# Altium PCB PCB_REVA.PcbDoc
Units mil, origin at the board's own origin, x right, y up, seen from the top; angles counter-clockwise.
Board outline 2190 x 1590 mil, 4 copper layers (Top Layer, GND, Medium Layer, Bottom Layer), stack 18.234 mil thick; 109 components, 91 nets, 422 pads, 127 vias.
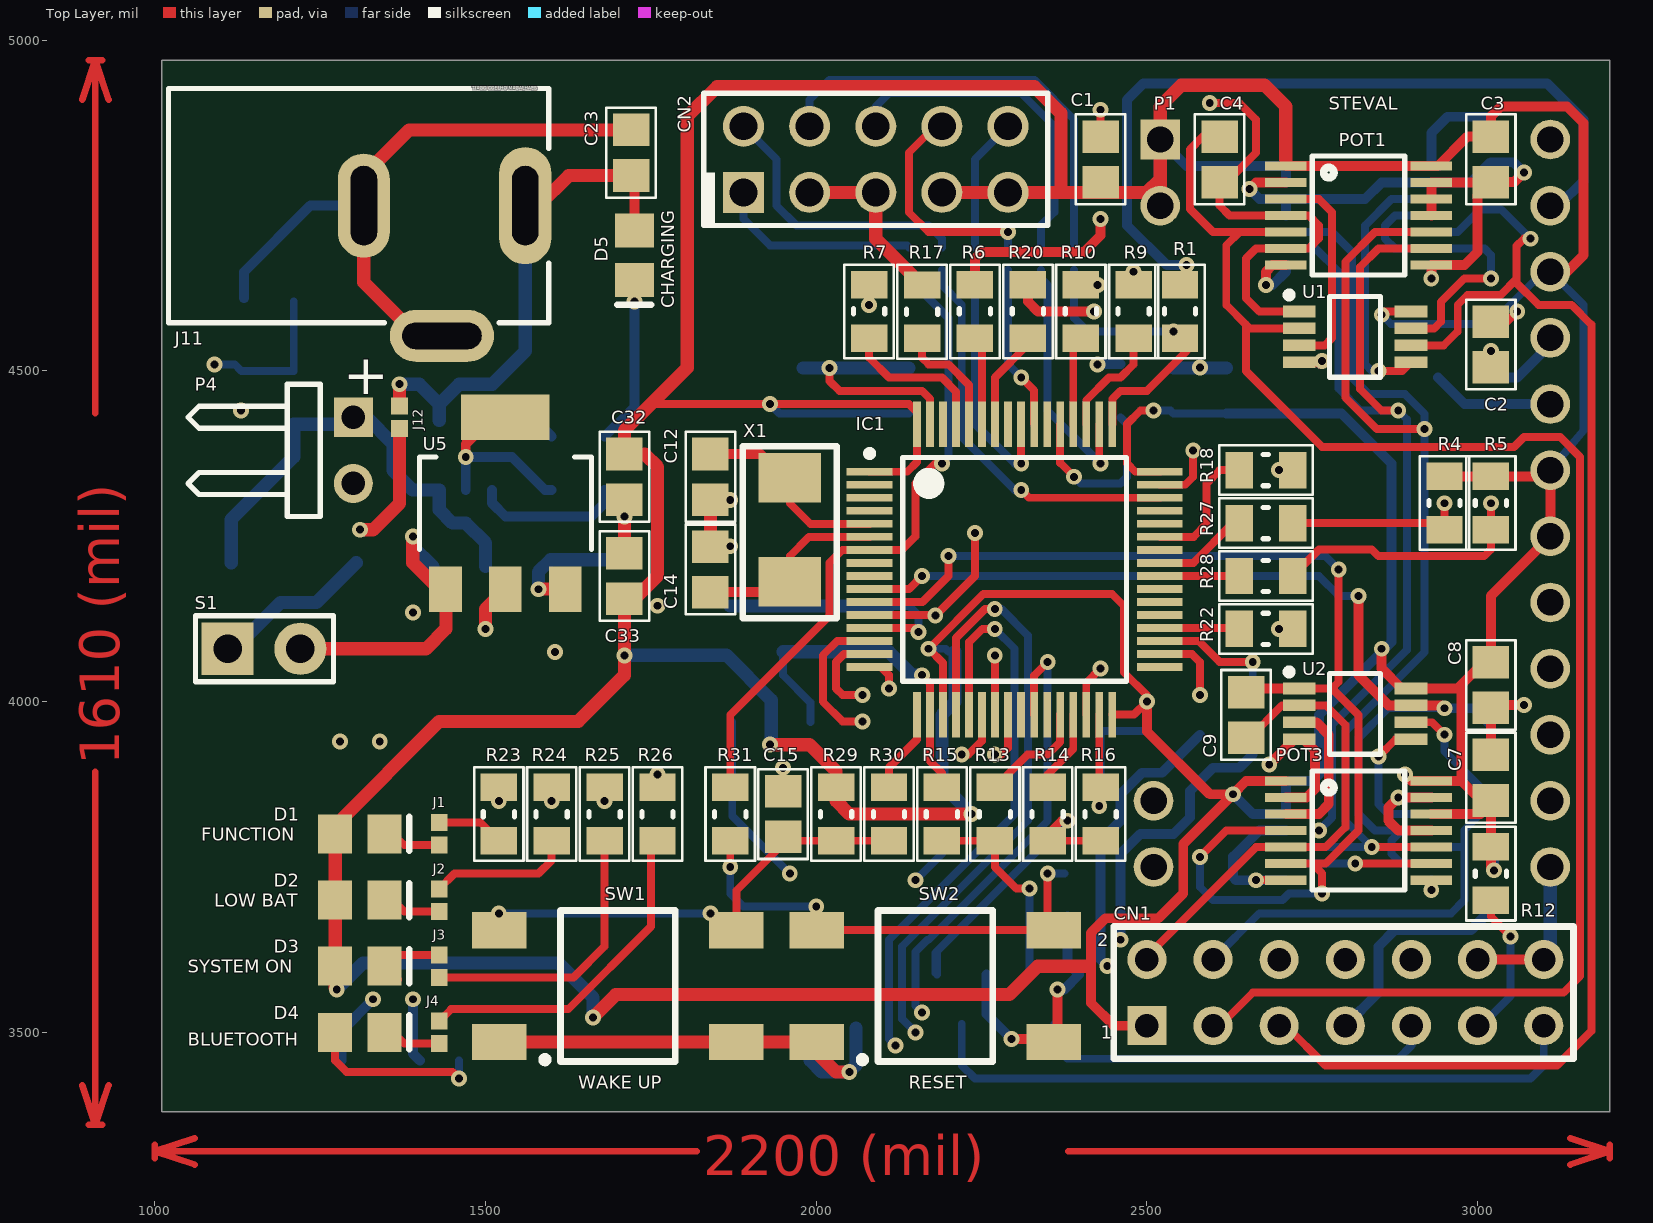
[diagram p0: Top Layer view]
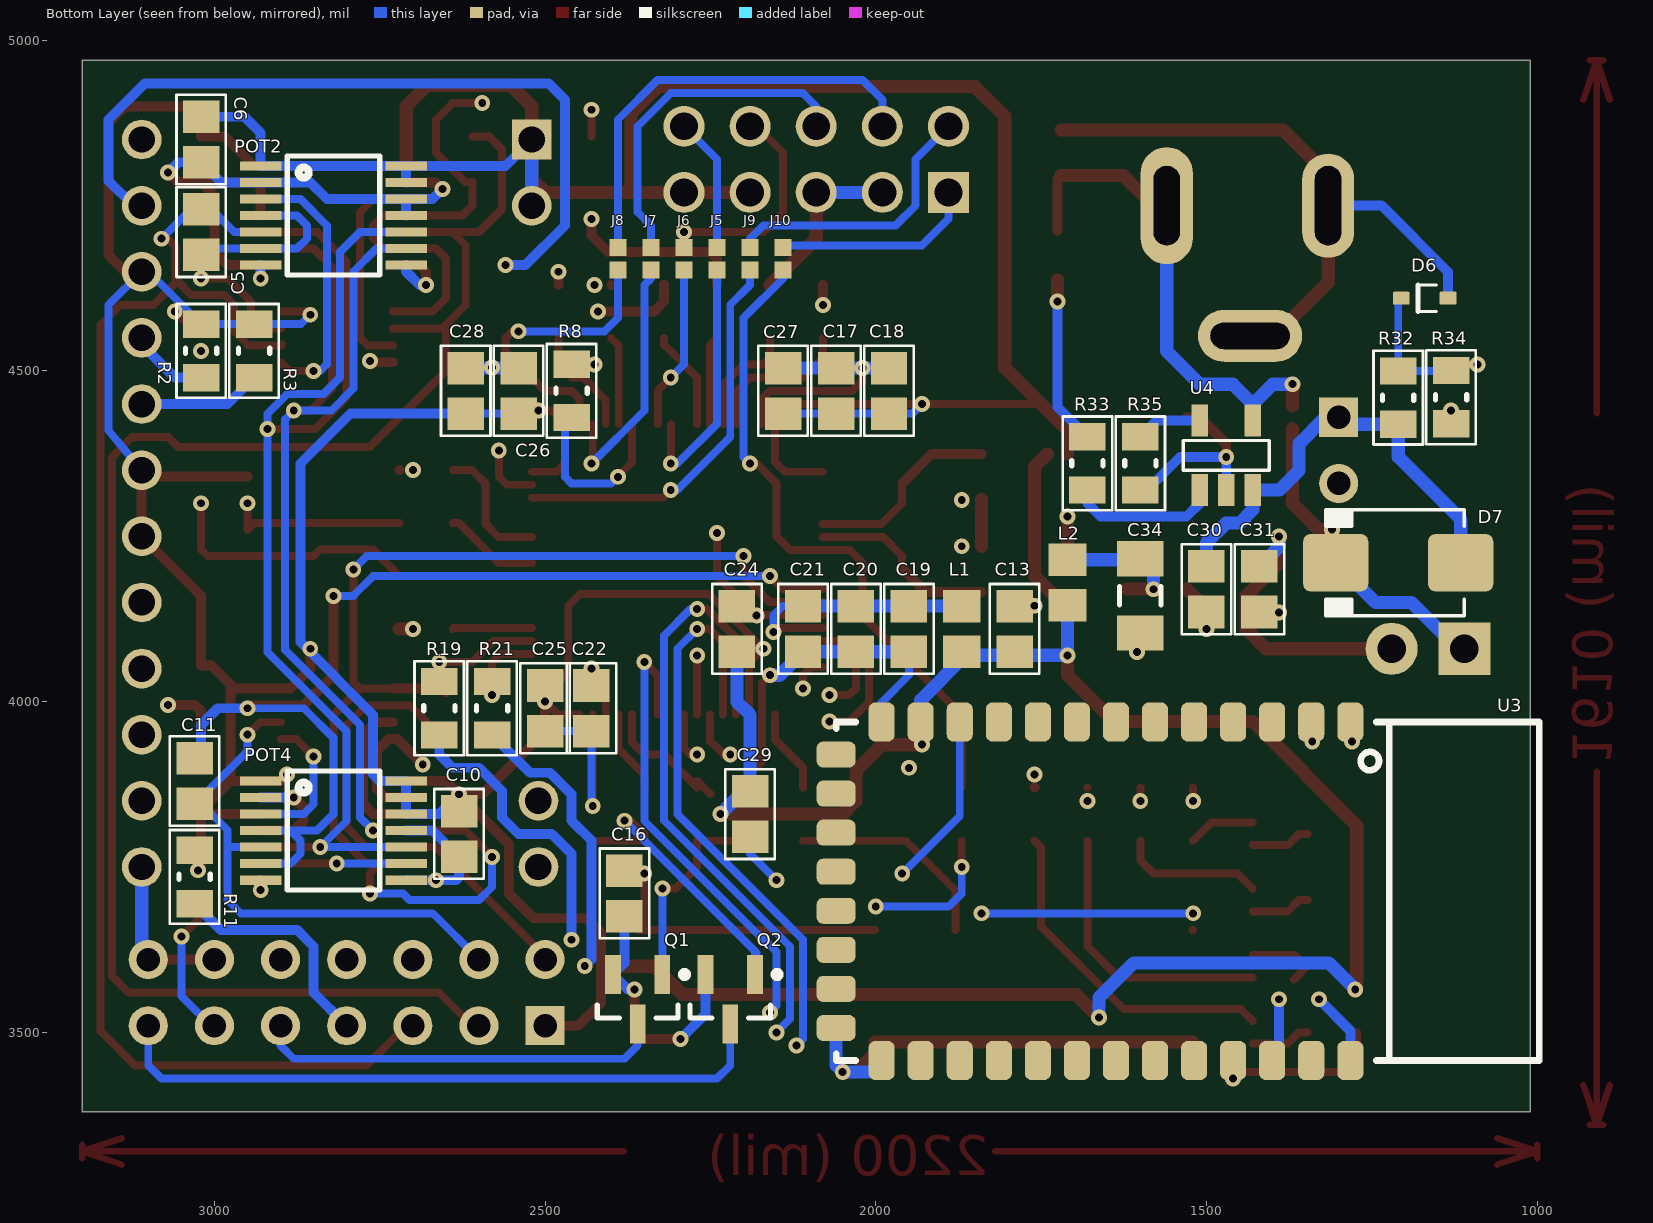
[diagram p1: Bottom Layer view, seen from below]
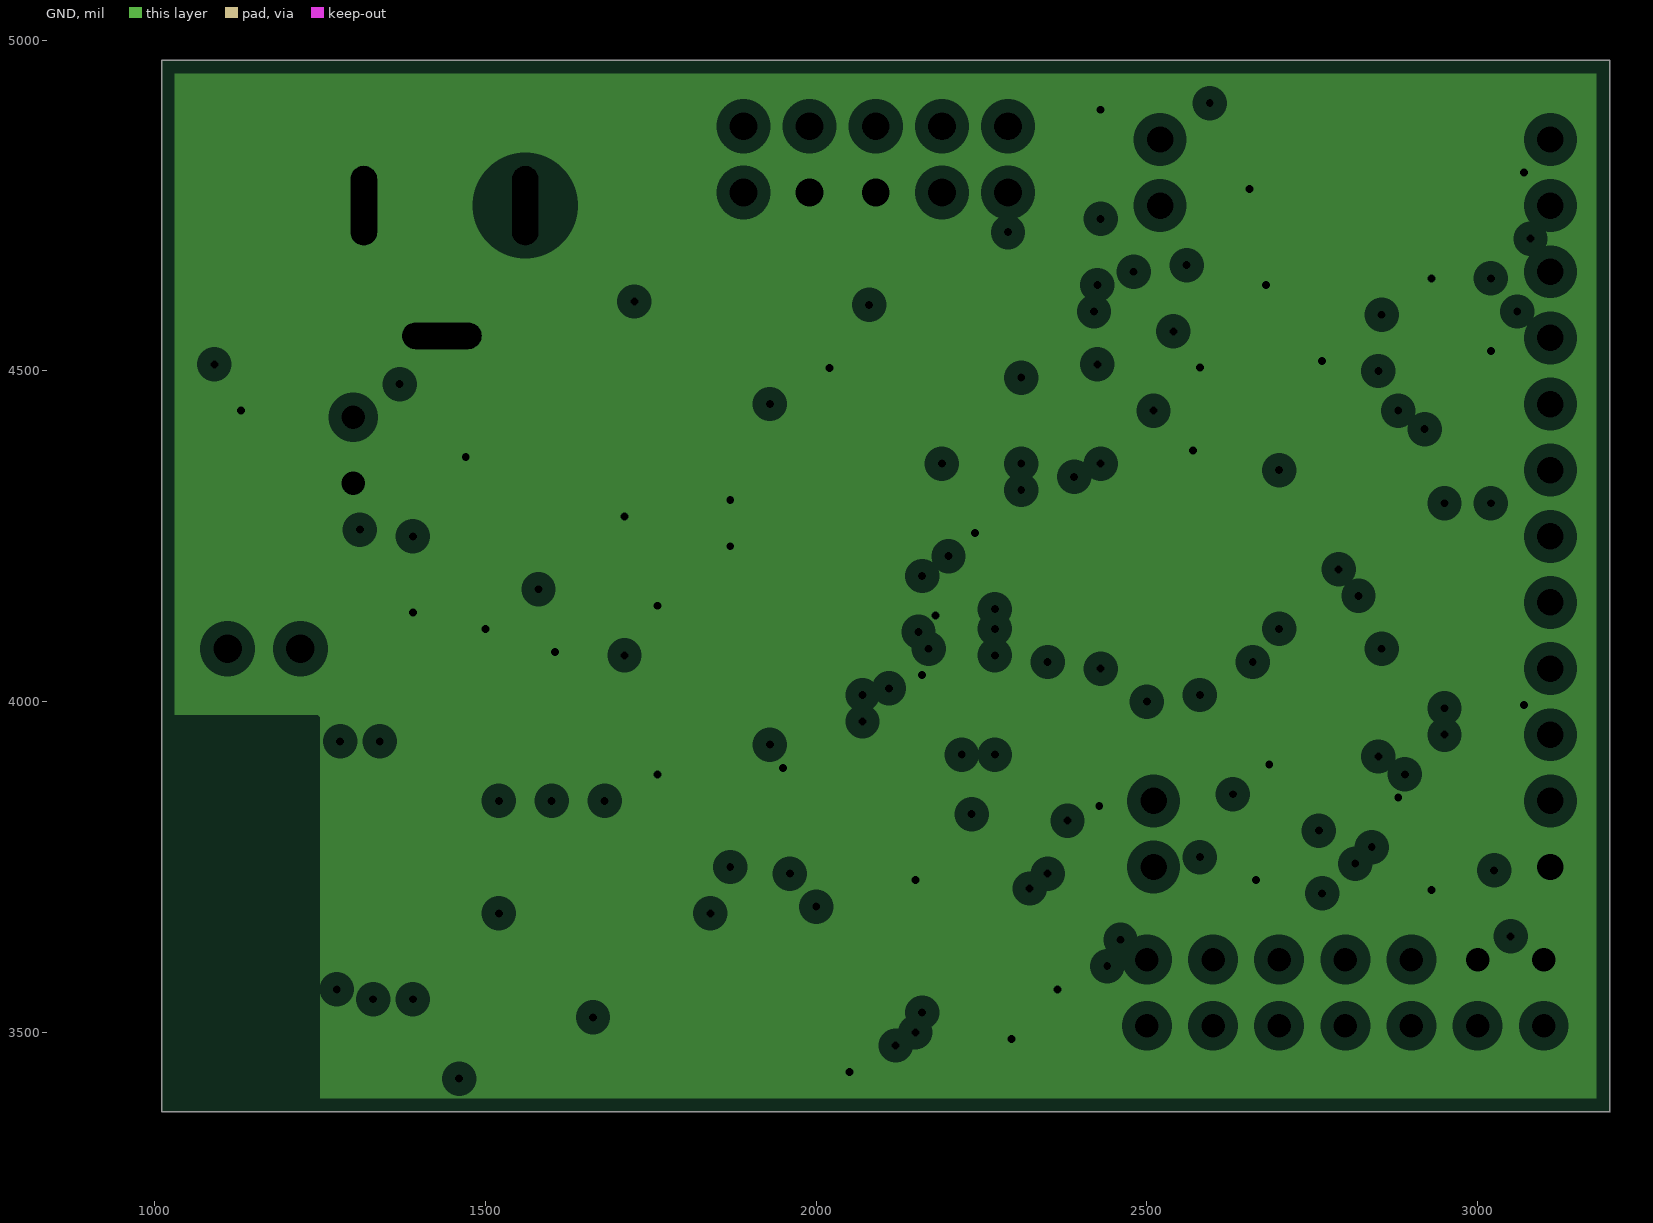
[diagram p2: GND, clearances drawn from the general rule]
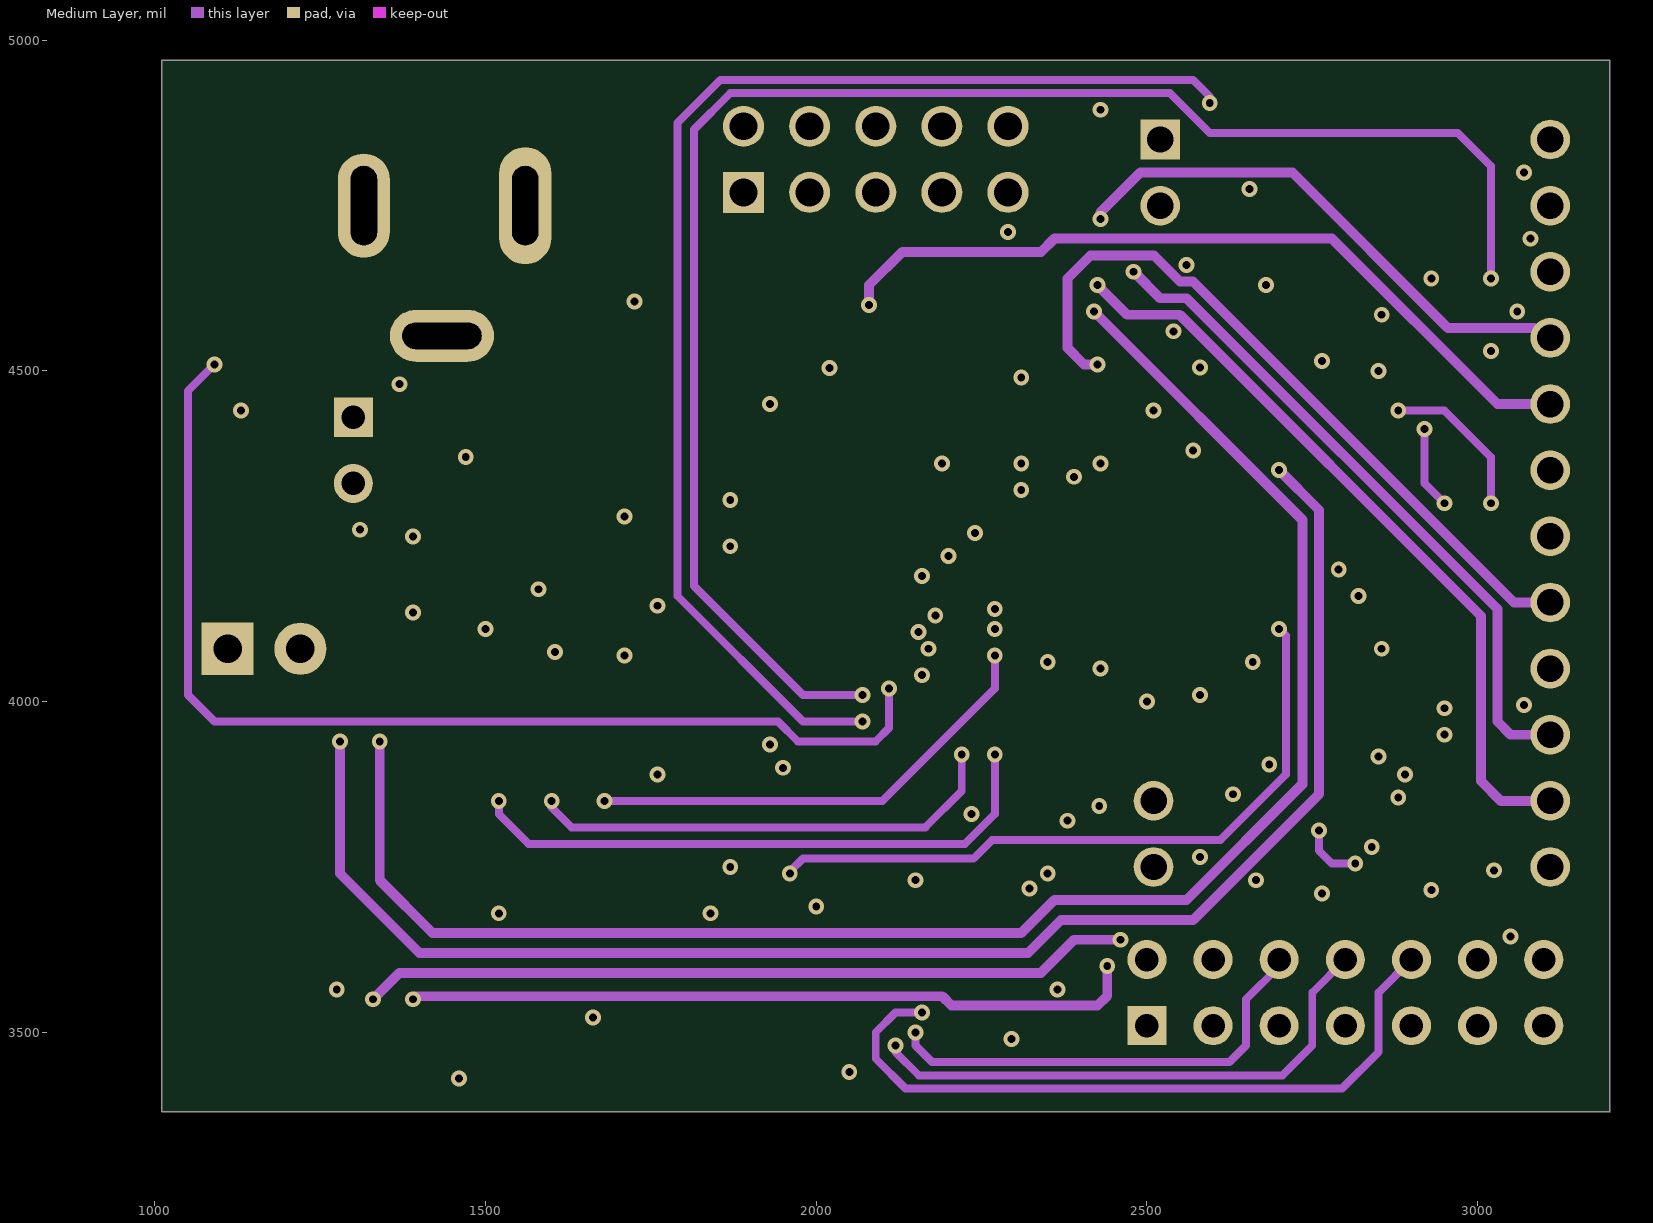
[diagram p3: Medium Layer]
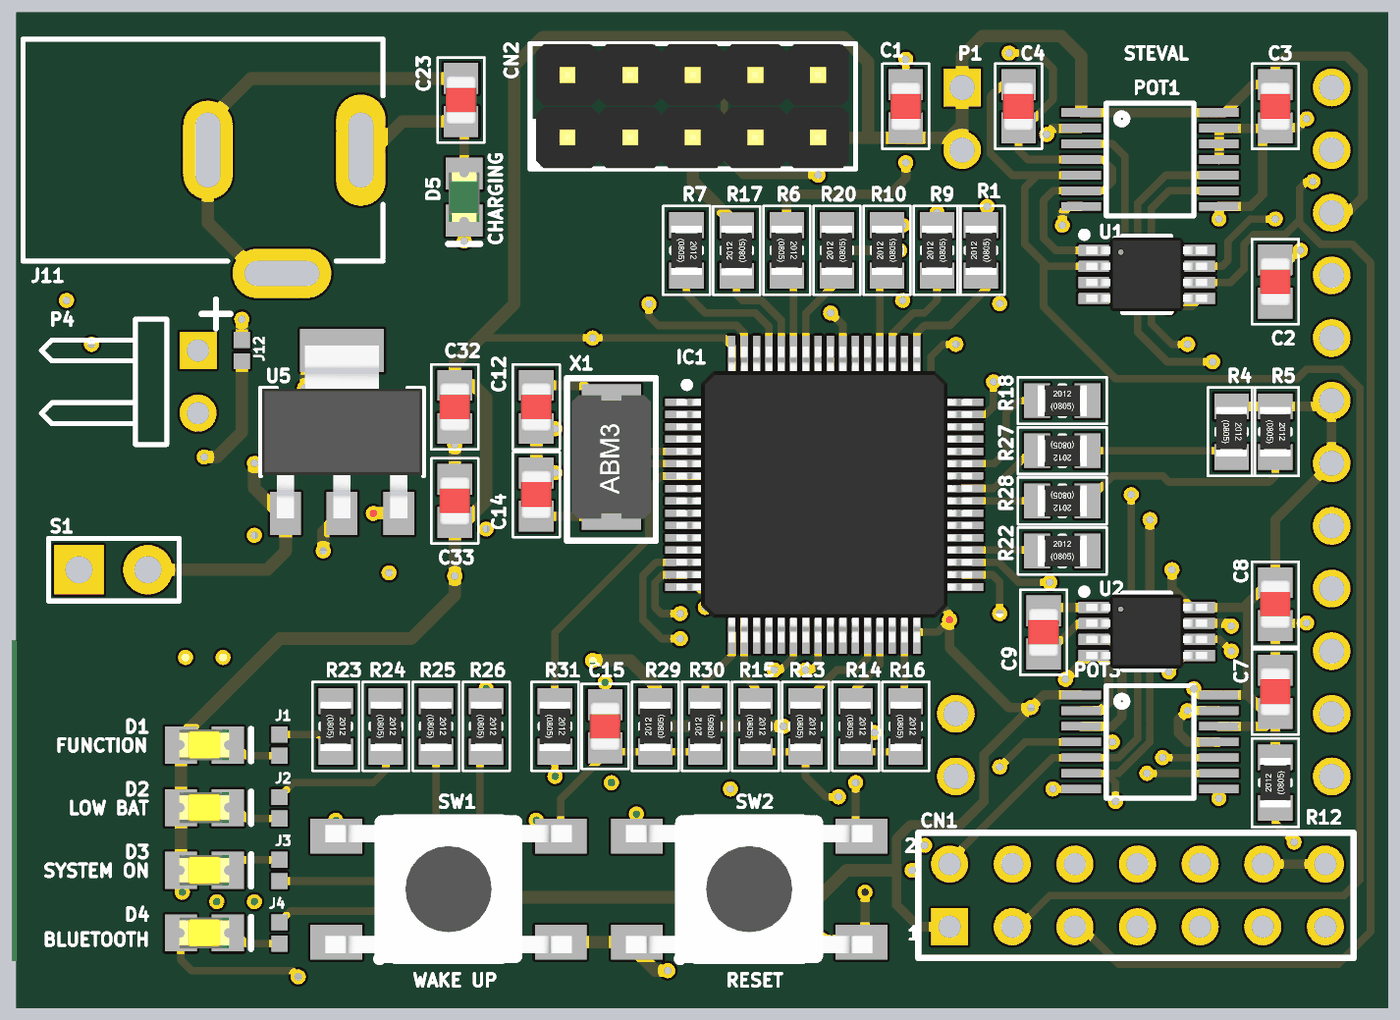
[diagram p4: 3D render of the assembled board from above, using the file's embedded part models]
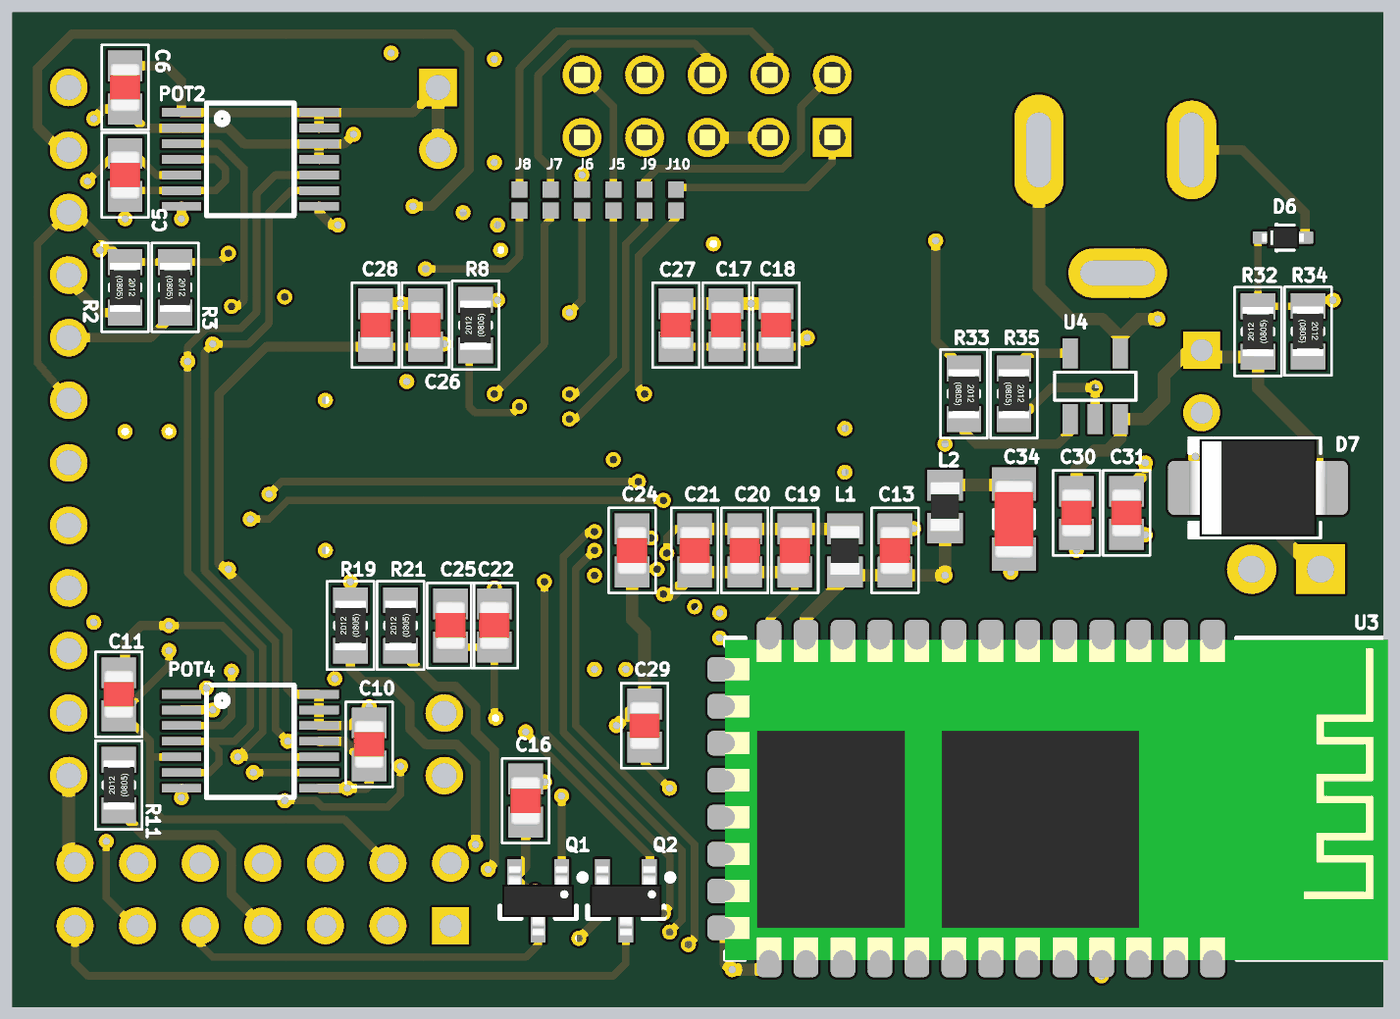
[diagram p5: 3D render of the assembled board from below, using the file's embedded part models]

## Layer stack, top to bottom
Top Solder: solder mask 0.4, Solder Resist, Dk 3.5
Top Layer: signal copper 1.4
GND: plane copper 1.417, net GND
Medium Layer: signal copper 1.417
Dielectric 1: dielectric 12.6, FR-4, Dk 4.8
Bottom Layer: signal copper 1.4
Bottom Solder: solder mask 0.4, Solder Resist, Dk 3.5

## Board outline
1010,4970 1010,3380 3200,3380 3200,4970

## Design rules (kind name [scope] priority, off if disabled: settings)
Clearance [All] p1: gap=5
PlaneClearance [All] p1: clearance=20
PlaneConnect [All] p1: planeconnectstyle=Relief reliefexpansion=20 reliefentries=4 reliefconductorwidth=10 reliefairgap=10
PolygonConnect [All] p1: connectstyle=Relief reliefconductorwidth=10 reliefentries=4 polygonreliefangle="90 Angle" airgapwidth=10
RoutingVias [All] p1: holewidth=28 width=50 viastyle="Through Hole" minholewidth=28 minwidth=50 maxholewidth=28 maxwidth=50
SolderMaskExpansion [All] p1: expansion=4
UnpouredPolygon [All] p1: allowunpoured=FALSE
Width [All] p1: maxlimit=50 minlimit=10 preferedwidth=15
27 further rules are at their usual default settings.

## Classes and differential pairs
component class Sensor: C1 C2 C3 C4 C5 C6 C7 C8 C9 C10 C11 C41 C42 C43 C44 C45 C46 C47 C48 C49 C50 C51 C75 CN1 L4 POT1 POT2 POT3 POT4 Q1 Q2 R1 R2 R3 R4 R5 R6 R7 R8 R9 R10 R11 R12 R13 R14 R15 R16 R85 R86 R87 R88 R98 R110 R112 U1 U2
component class uC: C12 C13 C14 C15 C16 C17 C18 C19 C20 C21 C22 C23 C24 C25 C26 C27 C28 C29 C30 C31 C32 C33 C34 CN2 D1 D2 D3 D4 D5 D6 D7 IC1 J1 J2 J3 J4 J5 J6 J7 J8 J9 J10 J11 J12 L1 L2 P4 R17 R18 R19 R20 R21 R22 R23 R24 R25 R26 R27 R28 R29 R30 R31 R32 R33 R34 R35 S1 SW1 SW2 U3 U4 U5 X1

## Components (designator, comment, footprint, x,y, rotation, side; value= is the part's Value field where it differs from the comment)
C1 "100nF" CAP0805[2012]MD-BO 2430,4820 r90 top
C2 "100nF" CAP0805[2012]MD-BO 3020,4540 r270 top
C3 "100nF" CAP0805[2012]MD-BO 3020,4820 r270 top
C4 "100pF" CAP0805[2012]MD-BO 2610,4820 r90 top
C5 "100nF" CAP0805[2012]MD-BO 3020,4850 r270 bottom
C6 "100pF" CAP0805[2012]MD-BO 3020,4710 r90 bottom
C7 "100nF" CAP0805[2012]MD-BO 3020,3885 r90 top
C8 "100nF" CAP0805[2012]MD-BO 3020,4025 r270 top
C9 "100pF" CAP0805[2012]MD-BO 2650,3980 r270 top
C10 "100nF" CAP0805[2012]MD-BO 2630,3800 r270 bottom
C11 "100pF" CAP0805[2012]MD-BO 3030,3880 r270 bottom
C12 "33pF" CAP0805[2012]MD-BO 1840,4340 r90 top
C13 "100nF" CAP0805[2012]MD-BO 1790,4110 r90 bottom
C14 "33pF" CAP0805[2012]MD-BO 1840,4200 r270 top
C15 "100nF" CAP0805[2012]MD-BO 1950,3830 r90 top
C16 "100nF" CAP0805[2012]MD-BO 2380,3710 r270 bottom
C17 "100nF" CAP0805[2012]MD-BO 2060,4470 r90 bottom
C18 "22uF" CAP0805[2012]MD-BO 1980,4470 r90 bottom
C19 "22uF" CAP0805[2012]MD-BO 1950,4110 r270 bottom
C20 "1uF" CAP0805[2012]MD-BO 2030,4110 r270 bottom
C21 "100nF" CAP0805[2012]MD-BO 2110,4110 r270 bottom
C22 "4.7uF" CAP0805[2012]MD-BO 2430,3990 r270 bottom
C23 "1uF" CAP0805[2012]MD-BO 1720,4830 r90 top
C24 "100nF" CAP0805[2012]MD-BO 2210,4110 r90 bottom
C25 "100nF" CAP0805[2012]MD-BO 2500,3990 r270 bottom
C26 "100nF" CAP0805[2012]MD-BO 2540,4470 r90 bottom
C27 "100nF" CAP0805[2012]MD-BO 2140,4470 r90 bottom
C28 "10uF" CAP0805[2012]MD-BO 2620,4470 r90 bottom
C29 "10uF" CAP0805[2012]MD-BO 2190,3830 r270 bottom
C30 "1uF" CAP0805[2012]MD-BO 1500,4170 r270 bottom
C31 "1uF" CAP0805[2012]MD-BO 1420,4170 r270 bottom
C32 "1uF" CAP0805[2012]MD-BO 1710,4340 r270 top
C33 "100nF" CAP0805[2012]MD-BO 1710,4190 r90 top
C34 "10uF" CAP1206[3216]MD 1600,4160 r270 bottom
CN1 "Header 7X2" HDR2X7 2500,3510 r0 top
CN2 "M-2.54x10" HDR-M-10P-2R-UNS_P2.54xW2.54xH6 1890,4770 r90 top
D1 "Verde" LEDP0805YELLOW 1310,3800 r180 top
D2 "VERM" LEDP0805YELLOW 1310,3700 r180 top
D3 "Verde" LEDP0805YELLOW 1310,3600 r180 top
D4 "Verde" LEDP0805YELLOW 1310,3500 r180 top
D5 "Verde" LEDP0805GREEN 1725,4675 r90 top
D6 "BZT585B3V3T" SOD523F 1170,4610 r180 bottom
D7 "MBRS130LT3G" DO-214AA 1210,4210 r0 bottom
IC1 "STM32F446RET6" LQFP64MD 2300,4200 r0 top
J1 "0R" JP0202[0505]MD 1430,3800 r270 top
J2 "0R" JP0202[0505]MD 1430,3700 r270 top
J3 "0R" JP0202[0505]MD 1430,3600 r90 top
J4 "0R" JP0202[0505]MD 1430,3500 r270 top
J5 "0R" JP0202[0505]MD 2240,4670 r90 bottom
J6 "0R" JP0202[0505]MD 2290,4670 r90 bottom
J7 "0R" JP0202[0505]MD 2340,4670 r90 bottom
J8 "0R" JP0202[0505]MD 2390,4670 r90 bottom
J9 "0R" JP0202[0505]MD 2190,4670 r90 bottom
J10 "0R" JP0202[0505]MD 2140,4670 r270 bottom
J11 "PWR2.5" CONECTOR_PJ 1560,4750 r0 top
J12 "0R" JP0202[0505]MD 1370,4430 r270 top
L1 "BLM21RK102SN1" IND0805[2012]MD 1870,4110 r90 bottom
L2 "BLM21AG601SN1D" IND0805[2012]MD 1710,4180 r270 bottom
P4 "Header 2H" HDR1X2H 1300,4430 r270 top
POT1 "TPL0102" TPL0102 2710,4810 r0 top
POT2 "TPL0102" TPL0102 2930,4810 r180 bottom
POT3 "TPL0102" TPL0102 2710,3880 r0 top
POT4 "TPL0102" TPL0102 2930,3880 r180 bottom
Q1 "2N7002P" SOT23-3 2360,3550 r270 bottom
Q2 "2N7002P" SOT23-3 2220,3550 r270 bottom
R1 "56R" RES0805[2012]MD-BO 2550,4590 r90 top
R2 "10K" RES0805[2012]MD 3020,4490 r90 bottom
R3 "10K" RES0805[2012]MD 2940,4490 r90 bottom
R4 "10K" RES0805[2012]MD 2950,4260 r90 top
R5 "10K" RES0805[2012]MD 3020,4260 r90 top
R6 "56R" RES0805[2012]MD-BO 2240,4590 r270 top
R7 "56R" RES0805[2012]MD-BO 2080,4590 r270 top
R8 "56R" RES0805[2012]MD-BO 2460,4470 r90 bottom
R9 "56R" RES0805[2012]MD-BO 2480,4590 r90 top
R10 "56R" RES0805[2012]MD-BO 2400,4590 r90 top
R11 "10K" RES0805[2012]MD-BO 3030,3735 r90 bottom
R12 "10K" RES0805[2012]MD-BO 3020,3740 r90 top
R13 "56R" RES0805[2012]MD-BO 2270,3830 r270 top
R14 "56R" RES0805[2012]MD-BO 2350,3830 r270 top
R15 "10K" RES0805[2012]MD-BO 2190,3830 r270 top
R16 "10K" RES0805[2012]MD-BO 2430,3830 r270 top
R17 "10K" RES0805[2012]MD 2160,4630 r270 top
R18 "56R" RES0805[2012]MD-BO 2680,4350 r0 top
R19 "56R" RES0805[2012]MD-BO 2660,3990 r90 bottom
R20 "56R" RES0805[2012]MD-BO 2320,4590 r90 top
R21 "56R" RES0805[2012]MD-BO 2580,3990 r90 bottom
R22 "56R" RES0805[2012]MD-BO 2680,4110 r0 top
R23 "330R" RES0805[2012]MD-BO 1520,3830 r270 top
R24 "330R" RES0805[2012]MD-BO 1600,3830 r270 top
R25 "330R" RES0805[2012]MD-BO 1680,3830 r270 top
R26 "330R" RES0805[2012]MD-BO 1760,3830 r270 top
R27 "56R" RES0805[2012]MD-BO 2680,4270 r180 top
R28 "56R" RES0805[2012]MD-BO 2680,4190 r180 top
R29 "10K" RES0805[2012]MD-BO 2030,3830 r90 top
R30 "56R" RES0805[2012]MD-BO 2110,3830 r90 top
R31 "56R" RES0805[2012]MD-BO 1870,3830 r270 top
R32 "1M2" RES0805[2012]MD 1210,4500 r270 bottom
R33 "1K" RES0805[2012]MD 1680,4320 r90 bottom
R34 "470K" RES0805[2012]MD 1130,4420 r90 bottom
R35 "1K8" RES0805[2012]MD 1600,4320 r90 bottom
S1 "SW-SPST" SWITCH 1110,4080 r0 top
SW1 "WKUP" TACSW1PSMD4_6x6x4.5 1700,3570 r90 top
SW2 "RESET" TACSW1PSMD4_6x6x4.5 2180,3570 r90 top
U1 "AD8542" MSOP8 2730,4590 r0 top
U2 "AD8542" MSOP8 2730,4020 r0 top
U3 "HC-05" HC-05 2060,3920 r270 bottom
U4 "LTC4054ES5-4.2" "5-LEAD TSOT-23 - duplicate2" 1510,4320 r180 bottom
U5 "AZ2940H-3.3TRG1-ND" SOT223MD 1530,4430 r0 top
X1 "25MHz" ABM3-8.000MHZ-D2Y-T 1960,4260 r90 top

## Footprints (in the part's own frame and the unit in brackets; to place one, negate y for a bottom-side part, rotate by r counter-clockwise, add the part's x,y. Pads: shape width x height; smd on the part's side, far side on the other; paste and mask are expansions set on the pad)
"5-LEAD TSOT-23 - duplicate2" [mm] "5-Lead Plastic TSOT-23 LTC4054-4.2/LTC4054X-4.2"
  rect 0.62x1.22 smd: 1(0,0) 2(1.016,0) 3(2.032,0) 4(2.032,2.667) 5(0,2.667)
  silkscreen extent -0.63,0.76 2.67,1.91
ABM3-8.000MHZ-D2Y-T [mm]
  rect 1.9x2.4 smd: 1(-2,0) 2(2,0)
  silkscreen extent -3.4,-1.8 3.2,1.8, body extent -2.5,-1.6 2.5,1.6, height 1.3
CAP0805[2012]MD-BO [mm]
  rect 1.25x1.4 smd: 1(-0.875,0) 2(0.875,0)
  silkscreen extent -1.73,-0.95 1.73,0.95, body extent -1,-0.63 1,0.63, height 0.78
CAP1206[3216]MD [mm]
  rect 1.35x1.8 smd: 1(-1.425,0) 2(1.425,0)
  silkscreen extent -0.35,-0.8 0.35,0.8, body extent -1.6,-0.8 1.6,0.8, height 1
CONECTOR_PJ [mm] "DC Power Jack, 2.5mm, KLD Series, PCB Mount"
  oval 2x4.5 hole 1.016 slot 3.048 at 90 deg: 1(0,0)
  oval 2x4 hole 1.016 slot 3.048 at 90 deg: 2(-6.2,0)
  oval 4x2 hole 1.016 slot 3.048 at 0 deg: 3(-3.2,-5)
  silkscreen extent -13.7,-4.5 0.9,4.5
DO-214AA [mm]
  round 0.508 on Mech15: 0(0,0)
  rrect25% 2.5x2.2 smd: A(-2.4,0) K(2.4,0)
  silkscreen extent -2.54,-2.03 2.79,2.03, body extent -2.8,-1.97 2.8,1.98, height 2.62
HC-05 [mm]
  rrect50% 1.5x1 smd: 1(-1.25,19.75) 2(-1.25,18.25) 3(-1.25,16.75) 4(-1.25,15.25) 5(-1.25,13.75) 6(-1.25,12.25) 7(-1.25,10.75) 8(-1.25,9.25) 9(-1.25,7.75) 10(-1.25,6.25) 11(-1.25,4.75) 12(-1.25,3.25) 13(-1.25,1.75) 22(11.75,1.75) 23(11.75,3.25) 24(11.75,4.75) 25(11.75,6.25) 26(11.75,7.75) 27(11.75,9.25) 28(11.75,10.75) 29(11.75,12.25) 30(11.75,13.75) 31(11.75,15.25) 32(11.75,16.75) 33(11.75,18.25) 34(11.75,19.75)
  rrect50% 1x1.5 smd: 14(0,0) 15(1.5,0) 16(3,0) 17(4.5,0) 18(6,0) 19(7.5,0) 20(9,0) 21(10.5,0)
  silkscreen extent -1.25,0 11.75,27, body extent -1.2,-0.04 11.8,26.86, height 2.43
HDR1X2H [mm] "Connector; Header; 2 Position; Right Angle"
  rect 1.5x1.5 hole 0.9: 1(0,0)
  round 1.5 hole 0.9: 2(2.54,0)
  silkscreen extent -1.27,-6.35 3.81,-1.27
HDR2X7 [mm] "Connector; Header; 7x2 Position"
  rect 1.5x1.5 hole 0.9: 1(0,0)
  round 1.5 hole 0.9: 2(0,2.54) 3(2.54,0) 4(2.54,2.54) 5(5.08,0) 6(5.08,2.54) 7(7.62,0) 8(7.62,2.54) 9(10.16,0) 10(10.16,2.54) 11(12.7,0) 12(12.7,2.54) 13(15.24,0) 14(15.24,2.54)
  silkscreen extent -1.27,-1.27 -1.27,3.81
HDR-M-10P-2R-UNS_P2.54xW2.54xH6 [mil]
  rect 62x62 hole 42: 1(0,0)
  round 62 hole 42: 2(100,0) 3(0,-100) 4(100,-100) 5(0,-200) 6(100,-200) 7(0,-300) 8(100,-300) 9(0,-400) 10(100,-400)
  silkscreen extent -50,-460 150,60, body extent -49,-450 149,50, height 336
IND0805[2012]MD [mm]
  rect 1.25x1.45 smd: 1(-0.875,0) 2(0.875,0)
  body extent -1,-0.6 1,0.6, height 0.95
JP0202[0505]MD [mm]
  rect 0.65x0.65 smd: 1(-0.432,0) 2(0.432,0)
  body extent -0.52,-0.27 0.53,0.28, height 0.1
LEDP0805GREEN [mm]
  rect 1.3x1.5 smd: 1(-0.95,0) 2(0.95,0)
  silkscreen extent -1.9,-0.65 -1.9,0.65, body extent -1.01,-0.62 1.01,0.63, height 1.1
LEDP0805YELLOW [mm]
  rect 1.3x1.5 smd: 1(-0.95,0) 2(0.95,0)
  silkscreen extent -1.9,-0.65 -1.9,0.65, body extent -1.01,-0.63 1.01,0.62, height 1.1
LQFP64MD [mm]
  rect 1.75x0.3 smd: 1(-5.575,3.75) 2(-5.575,3.25) 3(-5.575,2.75) 4(-5.575,2.25) 5(-5.575,1.75) 6(-5.575,1.25) 7(-5.575,0.75) 8(-5.575,0.25) 9(-5.575,-0.25) 10(-5.575,-0.75) 11(-5.575,-1.25) 12(-5.575,-1.75) 13(-5.575,-2.25) 14(-5.575,-2.75) 15(-5.575,-3.25) 16(-5.575,-3.75) 33(5.575,-3.75) 34(5.575,-3.25) 35(5.575,-2.75) 36(5.575,-2.25) 37(5.575,-1.75) 38(5.575,-1.25) 39(5.575,-0.75) 40(5.575,-0.25) 41(5.575,0.25) 42(5.575,0.75) 43(5.575,1.25) 44(5.575,1.75) 45(5.575,2.25) 46(5.575,2.75) 47(5.575,3.25) 48(5.575,3.75)
  rect 0.3x1.75 smd: 17(-3.75,-5.575) 18(-3.25,-5.575) 19(-2.75,-5.575) 20(-2.25,-5.575) 21(-1.75,-5.575) 22(-1.25,-5.575) 23(-0.75,-5.575) 24(-0.25,-5.575) 25(0.25,-5.575) 26(0.75,-5.575) 27(1.25,-5.575) 28(1.75,-5.575) 29(2.25,-5.575) 30(2.75,-5.575) 31(3.25,-5.575) 32(3.75,-5.575) 49(3.75,5.575) 50(3.25,5.575) 51(2.75,5.575) 52(2.25,5.575) 53(1.75,5.575) 54(1.25,5.575) 55(0.75,5.575) 56(0.25,5.575) 57(-0.25,5.575) 58(-0.75,5.575) 59(-1.25,5.575) 60(-1.75,5.575) 61(-2.25,5.575) 62(-2.75,5.575) 63(-3.25,5.575) 64(-3.75,5.575)
  silkscreen extent -5.7,-4.3 4.3,4.57, body extent -6,-6 6,6, height 1.6
MSOP8 [mm] "AD8542"
  rect 1.25x0.45 smd: 1(0,0) 2(0,-0.65) 3(0,-1.3) 4(0,-1.95) 5(4.3,-1.95) 6(4.3,-1.3) 7(4.3,-0.65) 8(4.3,0)
  silkscreen extent -0.51,-2.52 3.13,0.76, body extent -0.3,-2.47 4.6,0.53, height 1.15
RES0805[2012]MD [mm] "RESISTOR 0805"
  rect 1.05x1.4 smd: 1(0,0) 2(2.05,0)
  silkscreen extent -0.77,-0.95 2.83,0.95, body extent 0.02,-0.63 2.02,0.63, height 0.45
RES0805[2012]MD-BO [mm]
  rect 1.05x1.4 smd: 1(-1.025,0) 2(1.025,0)
  silkscreen extent -1.8,-0.95 1.8,0.95, body extent -1,-0.63 1,0.63, height 0.45
SOD523F [mm]
  round 0.508 on Mech15: 0(0,0)
  rrect20% 0.65x0.5 smd: A(0.9,0) K(-0.9,0)
  Top Layer pour cut-out: -0.725,-0.25 -0.725,0.25 -0.525,0.45 0.525,0.45 0.725,0.25 0.725,-0.25 0.525,-0.45 -0.525,-0.45
  silkscreen extent -0.25,-0.51 0.45,0.51, body extent -0.85,-0.45 0.85,0.45, height 0.7
SOT23-3 [mm]
  rect 1.5x0.6 smd: 1(-0.95,0.95) 2(-0.95,-0.95) 3(0.95,0)
  silkscreen extent -1.07,-1.55 0.71,1.92, body extent -1.4,-1.45 1.4,1.45, height 1.3
SOT223MD [mm]
  rect 1.25x1.75 smd: 1(-2.3,-6.6) 2(0,-6.6) 3(2.3,-6.6)
  rect 3.4x1.75 smd: 4(0,0)
  silkscreen extent -3.3,-5.08 3.3,-1.52, body extent -3.25,-6.8 3.25,0.2, height 1.67
SWITCH [mm] "CONNECTOR FOR SWITCH"
  rect 2x2 hole 1.1: 1(0,0)
  round 2 hole 1.1: 2(2.794,0)
  silkscreen extent -1.23,-1.27 4.06,1.27
TACSW1PSMD4_6x6x4.5 [mm]
  rect 1.4x2.1 smd: 1(-2.15,4.55) 2(-2.15,-4.55) 3(2.15,4.55) 4(2.15,-4.55)
  silkscreen extent -2.95,-2.2 2.9,2.93, body extent -3,-5 3,5, height 5.07
TPL0102 [mm] "DIGITAL POTENTIOMETER"
  rect 1.6x0.35 smd: 1(0,0) 2(0,-0.635) 3(0,-1.27) 4(0,-1.905) 5(0,-2.54) 6(0,-3.175) 7(0,-3.81) 8(5.588,-3.81) 9(5.588,-3.175) 10(5.588,-2.54) 11(5.588,-1.905) 12(5.588,-1.27) 13(5.588,-0.635) 14(5.588,0)
  silkscreen extent 1.02,-4.19 4.57,0.38, body extent 1.02,-4.19 4.57,0.34, height 2

## Part data
C1 C2 C3 C5 C7 C8 C10 C13 C15 C16 C17 C21 C24 C25 C26 C27 C33: library part "SMD 0805 100nF 50V 10% X7R", "CERAMIC SMD 0805 100nF 50V 10% X7R"
C4 C6 C9 C11: library part "SMD 0805 100pF 50V 5% C0G", "CERAMIC SMD 0805 100pF 50V 5% C0G"
C12 C14: library part "SMD 0805 33pF 50V 5% C0G", "CERAMIC SMD 0805 33pF 50V 5% C0G"
C18 C19: library part "SMD 0805 22uF 10V 20% X5R", "CERAMIC SMD 0805 22uF 10V 20% X5R"
C20 C23 C30 C31 C32: library part "SMD 0805 1uF 50V 10% X7R", "CERAMIC SMD 0805 1uF 50V 10% X7R"
C22: library part "SMD 0805 4.7uF 10V 10% X5R", "CERAMIC SMD 0805 4.7uF 10V 10% X5R"
C28 C29: library part "SMD 0805 10uF 10V 10% X7R", "CERAMIC SMD 0805 10uF 10V 10% X7R"
C34: library part "SMD 1206 10uF 35V 10% X7R", "CERAMIC SMD 1206 10uF 35V 10% X7R"
CN1: "Header, 7-Pin, Dual row"
CN2: library part "HDR M UNSH 10P 2R 2.54MM 6MM", "HEADER MALE UNSHROUDED 10P 2ROW 2.54MM 6MM"
D1 D2 D3 D4: library part "LED AMARELO SMD 0805 Vf 2V DIFF", "LED AMARELO SMD 0805 DIF"
D5: library part "LED VERDE SMD 0805 Vf  2,2 V DIFF", "LED VERDE SMD 0805 DIF"
D6: library part BZT585B3V3, "BZT585B3V3T-7DICT-ND"
D7: library part DIODE_SCHOTTKY_MBRS130L, "Diode Schottky SMD 30V 2A DO-214AA"
IC1: "IC MCU ARM M4 512KB FLASH 128K RAM LQFP64"
J1 J2 J3 J4 J5 J6 J7 J8 J9 J10 J12: library part "SOLDER JUMP 1.5A 0202", "SOLDER JUMP 1.5A 0202"
J11: "Low Voltage Power Supply Connector"
L1: "Ferrite Bead 0805 1000R 100MHz 200mA 0.5R DC"
L2: "FERRITE BEAD 600R@100MHz 210mRDC 600mA 0805"
P4: "Header, 2-Pin, Right Angle"
Q1 Q2: library part 2N7002P,215, "MOSFET N-CH 60V 360mA SOT23-3"
R1 R6 R7 R8 R9 R10 R13 R14 R18 R19 R20 R21 R22 R27 R28 R30 R31: library part "SMD 0805 56R 5% 0.125W", "RESISTOR SMD 0805 56R 5% 0.125W"
R2 R3 R4 R5 R11 R12 R15 R16 R17 R29: library part "SMD 0805 10K 5% 0.125W", "RESISTOR SMD 0805 10K 5% 0.125W"
R23 R24 R25 R26: library part "SMD 0805 330R 5% 0.125W", "RESISTOR SMD 0805 330R 5% 0.125W"
R32 R34: library part RES_10K_0805_5%, "Resistor SMD chip 10k Ohm 0.125W 5% 0805"
R33: library part "SMD 0805 1K 5% 0.125W", "RESISTOR SMD 0805 1K 5% 0.125W"
R35: library part "SMD 0805 1K8 5% 0.125W", "RESISTOR SMD 0805 1K8 5% 0.125W"
S1: "Single-Pole, Single-Throw Switch"
SW1 SW2: library part "TAC SWITCH 1P SPST-NO 0.05A 24V 4.3mm SMD", "TAC SWITCH 1P SPST-NO 0.05A 24V 4.3mm SMD"
U3: "Master/Slave Bluetooth Serial Module"
X1: library part ABM3-8.000MHZ-D2Y-T, "8MHz ±20ppm Crystal 18pF 140 Ohm -40°C ~ 85°C Surface Mount 2-SMD"

## Free pads (board coordinates)
  rect 60x60 hole 40: 0(2520,4850)
  round 60 hole 40: 1(2520,4750) 4(2510,3850) 5(2510,3750) 6(3110,3750) 7(3110,3850) 8(3110,3950) 9(3110,4050) 10(3110,4150) 11(3110,4250) 12(3110,4350) 13(3110,4450) 14(3110,4550) 15(3110,4650) 16(3110,4750) 17(3110,4850)

## Via types
v1: diameter 24.02, hole 12.01, Top Layer to Bottom Layer, 127 vias

## Nets (pads, with @x,y where several pads share a name; then routed paths per layer and width w, separated by ;. In a path a pad name is that pad's centre, name@x,y a point inside that pad or via, vN(x,y) a via of type N, cw(c..) or ccw(c..) an arc to the next point about the centre after c; other vN are vias at no path point)
+3.3V: C1.1 C2.1 C3.1 C5.1 C7.1 C8.1 C10.1 C13.1 C17.1 C18.1 C24.1 C25.1 C26.1 C27.1 C28.1 C29.1 C32.1 C33.1 CN1.1 CN2.7 CN2.9 D1.2 D2.2 D3.2 IC1.1 IC1.19 IC1.32 IC1.48 IC1.64 L1.1 L2.2 pad.0 pad.1 pad.11 pad.12 pad.15 POT1.1 POT1.14 POT2.1 POT2.13 POT2.14 POT3.1 POT3.12 POT3.14 POT4.1 POT4.12 POT4.13 POT4.14 R2.2 R3.2 R4.2 R5.2 R11.2 R12.2 R29.2 U1.8 U2.8 U3.12 | length 12534.3
  Top Layer w12: 1750,4450 v1(1930,4450) 2140,4450 2152.36,4437.64 IC1.64 2152.36,4362.36 2137.64,4347.64 IC1.1 ; IC1.19 2191.73,4058.27 v1(2170,4080) 2253.01,4163.01 2446.99,4163.01 2465,4145 2465,4044.5 2500,4009.5 v1(2500,4000) 2480.51,3980.51 IC1.32 ; v1(2510,4440) 2490,4440 2470,4420 2470,4360 2482.36,4347.64 IC1.48 ; v1(2855,4585) 2860,4590 U1.8 ; C2.1 3044.45,4574.45 v1(3060,4590)
  Top Layer w15: CN1.1 2450,3510 2415.47,3544.53 2415.47,3650.47 2437.5,3672.5 2517.5,3672.5 2555,3710 2555,3785 v1(2630,3860) ; v1(2500,4000) 2500,3955 2595,3860 v1(2630,3860) ; POT3.1 2650,3880 v1(2630,3860) ; POT1.1 POT1.14 2940,4810 2984.45,4854.45 C3.1 3020,4885 3035,4900 3135,4900 3160,4875 3160,4675 3135,4650 pad.15 ; v1(2855,4080) 2855,4050 2885,4020 U2.8 2970,4020 2975.91,4025.91 ; v1(2890,3890) 2900,3880 POT3.14 2975.91,3880 ; POT3.12 3004.45,3830 C7.1@3020,3845.55 ; R4.2 R5.2 3090.71,4340.71 pad.12 pad.11 3020,4160 C8.1 3020,4054.45 3004.45,4054.45 2975.91,4025.91 ; v1(3025,3745) 3020,3750 R12.2 3020,3835.91 3015.18,3840.73 3012.68,3843.23 3010.36,3845.55 2975.91,3880 ; 2975.91,3880 2975.91,4025.91
  Top Layer w20: v1(1275,3565) 1272.6,3567.4 D3.2 D2.2 D1.2 1272.6,3812.6 1430,3970 1640,3970 1710,4040 v1(1710,4070) C33.1 1725.55,4155.55 1760,4190 1760,4355 1740.55,4374.45 ; v1(1662.5,3522.5) 1697.01,3557.01 2292.01,3557.01 2335,3600 2412.99,3600 ; C32.1 1710,4410 1750,4450 1805,4505 1805,4885 1850,4930 2330,4930 2370,4890 2370,4770 ; v1(1930,3935) 1990,3935 2030,3895 R29.2 2030,3850 2050,3830 v1(2235,3830) ; CN2.7 CN2.9 2370,4770 ; pad.1 2520,4790 ; 2710,4820 2710,4900 2677.99,4932.01 2552.01,4932.01 2520,4900 pad.0 2520,4790 ; C7.1@3010.36,3845.55 C7.1@3020,3845.55 ; 2370,4770 2500,4770 2520,4790
  Bottom Layer w12: v1(1930,4450) 1944.45,4435.55 C18.1 C17.1 C27.1 ; v1(2170,4080) 2195.55,4080 C24.1@2200,4075.55 ; v1(2510,4440) 2535.55,4440 C26.1 C28.1 ; v1(2855,4585) 2869.29,4570.71 R3.2 R2.2 3099.29,4650 pad.15 3160,4600 3160,4410 pad.12
  Bottom Layer w15: pad.0 2560,4810 POT2.14 ; C28.1 2794.45,4435.55 2870,4360 2870,4090 2760,3980 2760,3890 2750,3880 POT4.14 POT4.13 POT4.12 2660,3830 v1(2630,3860) ; POT2.13 POT2.14 ; C5.1 2954.45,4884.45 2930,4860 POT2.1 POT2.14 ; v1(3025,3745) 3025,3770.35 R11.2
  Bottom Layer w20: v1(1275,3565) 1315,3605 1610,3605 1662.5,3552.5 v1(1662.5,3522.5) ; L2.2 v1(1710,4070) 1864.45,4070 1932.05,4002.4 U3.12 v1@1932.05,3937.05 ; C24.1 2210,4000 2190,3980 C29.1 2200.55,3864.45 v1(2235,3830) ; pad.1 pad.0
+3V3_UC: C19.1 C20.1 C21.1 IC1.13 L1.2 | length 397.4
  Top Layer w12: IC1.13 2148.75,4111.42 v1(2154.57,4105.6)
  Bottom Layer w12: C21.1 2140.55,4144.45 2154.57,4130.43 v1(2154.57,4105.6) v1@2148.85,4105.6
  Bottom Layer w20: L1.2 C19.1 C20.1 C21.1
+VCAP1: C22.1 IC1.30 | length 78.5
  Top Layer w12: IC1.30 2408.27,4028.27 v1(2430,4050)
BAT_LOW: IC1.22 R24.1 | length 819.7
  Top Layer w12: v1(1600,3850) R24.1 ; v1(2220,3920) 2230,3920 2250.79,3940.79 IC1.22
  Medium Layer w12: v1(1600,3850) 1600,3840 1630,3810 2165,3810 2220,3865 v1(2220,3920)
BAT_SENSOR: D6.K IC1.16 R32.1 R34.2 | length 1958
  Top Layer w12: IC1.16 2097.64,4052.36 2110,4040 v1(2110,4020)
  Medium Layer w12: v1(1090,4510) 1050,4470 1050,4010 1090,3970 1942.05,3970 1972.05,3940 2090,3940 2110,3960 v1(2110,4020)
  Bottom Layer w12: v1(1090,4510) 1120.71,4510 R34.2 1130.71,4500 R32.1 D6.K@1210,4605.43
BT_EN: IC1.35 R19.2 | length 183.3
  Top Layer w12: IC1.35 2578.27,4091.73 2610,4060 v1(2660,4060)
  Bottom Layer w12: R19.2 v1(2660,4060)
BT_RST: IC1.36 R22.1 | length 120.7
  Top Layer w12: IC1.36 2638.23,4111.42 R22.1
BT_RX: IC1.58 R20.1 | length 150.7
  Top Layer w12: IC1.58 2270.47,4490 2320,4539.53 R20.1
BT_STATUS: IC1.34 R21.2 | length 135.9
  Top Layer w12: IC1.34 2567.95,4072.05 2580,4060 v1(2580,4010)
  Bottom Layer w12: v1(2580,4010) R21.2
BT_TX: IC1.43 R18.1 | length 198
  Top Layer w12: IC1.43 2570.79,4249.21 2590,4268.43 2590,4330 2610,4350 R18.1
BT_WORK: D4.2 U3.31 | length 268.9
  Top Layer w12: D4.2 1272.6,3457.4 1290,3440 1450,3440 v1(1460,3430)
  Bottom Layer w12: U3.31 1460,3457.01 v1(1460,3430)
DAC1: CN1.6 IC1.20 | length 1637.5
  Top Layer w12: IC1.20 2211.42,4096.42 2255,4140 v1(2270,4140)
  Medium Layer w12: v1(2150,3500) 2150,3480 2175,3455 2625,3455 2650,3480 2650,3550 2700,3600 CN1.6
  Bottom Layer w12: v1(2150,3500) 2130,3520 2130,3630 2320,3820 2320,4100 2280,4140 v1(2270,4140)
DAC2: CN1.8 IC1.21 | length 1705.8
  Top Layer w12: IC1.21 2231.1,4090 2251.1,4110 v1(2270,4110)
  Medium Layer w12: v1(2120,3480) 2120,3470 2155,3435 2705,3435 2750,3480 2750,3560 CN1.8
  Bottom Layer w12: v1(2120,3480) 2110,3490 2110,3640 2300,3830 2300,4080 v1(2270,4110)
DEN_A/G: IC1.49 J8.1 R1.1 | length 455.7
  Top Layer w12: IC1.49 2447.64,4457.64 2460,4470 2500,4470 2560,4530 2560,4549.65 2549.65,4560 v1(2540,4560)
  Bottom Layer w12: J8.1 2390,4580 2410,4560 v1(2540,4560)
EXT_VDC: C23.1 D5.2 J11.1 J12.1 U4.4 | length 777.7
  Top Layer w15: J11.1 J11.1@1580,4750 ; C23.1 1725,4790.55 D5.2
  Top Layer w20: J12.1 v1(1370,4480) ; J11.1@1580,4750 1625.55,4795.55 C23.1
  Bottom Layer w20: v1(1370,4480) 1400,4480 1430,4450 ; U4.4 1430,4450 ; J11.1 1560,4530 1510,4480 1460,4480 1430,4450
F1+: POT1.3 U1.3 | length 322.9
  Top Layer w12: POT1.3 2760,4760 2780,4740 2780,4550 2768.82,4538.82 U1.3
F2+: POT2.3 U1.5 | length 405.5
  Top Layer w12: v1(2850,4500) 2886.06,4500 U1.5
  Bottom Layer w12: v1(2850,4500) 2840,4500 2830,4510 2830,4720 2870,4760 POT2.3
F3+: POT3.3 U2.3 | length 229
  Top Layer w15: POT3.3 2760,3830 2775,3845 2775,3950 2756.18,3968.82 U2.3
F4+: POT4.3 U2.5 | length 218.4
  Top Layer w12: v1(2850,3916.99) 2876.24,3943.23 U2.5
  Bottom Layer w12: v1(2850,3916.99) 2850,3845 2865,3830 POT4.3
FSR1: C4.2 CN1.3 POT1.5 U1.2 | length 2557.9
  Top Layer w12: CN1.3 2610,3510 2660,3560 3130,3560 3155,3585 3155,4370 3125,4400 3070,4400 3055,4385 2765,4385 2650,4500 2650,4570 ; C4.2 2584.45,4854.45 2565,4835 2565,4745 2600,4710 2640,4710 ; POT1.5 2640,4710 ; U1.2 2655.59,4564.41 2650,4570 ; 2640,4710 2620,4690 2620,4600 2650,4570
FSR2: C6.2 CN1.5 POT2.5 U1.6 | length 2206
  Top Layer w12: CN1.5 2710,3510 2770,3450 3120,3450 3172,3502 3172,4570 3142,4600 3092.02,4600 3059,4633.02 3059,4639 ; U1.6@2898.11,4540 U1.6 2948.82,4538.82 2970,4560 2970,4600 2985,4615 3035,4615 3059,4639 ; v1@3070,4700 3059,4689 3059,4639
  Bottom Layer w12: POT2.5 2970,4710 3004.45,4744.45 C6.2 3035.55,4744.45 v1(3080,4700)
FSR3: C9.2 CN1.2 POT3.5 U2.2 | length 723.2
  Top Layer w12: CN1.2 2500,3615 2665,3780 POT3.5 2770,3780 2800,3810 2800,3965 2770.59,3994.41 U2.2 2704.41,3994.41 2655.55,3945.55 C9.2
FSR4: C11.2 CN1.4 POT4.5 U2.6 | length 820.8
  Top Layer w12: U2.6 2931.18,3968.82 v1(2950,3950)
  Bottom Layer w12: CN1.4 2670,3680 2960,3680 2980,3700 2980,3805.55 C11.2@3020,3845.55 ; POT4.5 2975,3780 ; v1(2950,3950) 2950,3925 3029.45,3845.55 C11.2
GND: C1.2 C2.2 C3.2 C5.2 C7.2 C8.2 C10.2 C12.1 C13.2 C14.1 C15.2 C16.2 C17.2 C18.2 C19.2 C20.2 C21.2 C22.2 C23.2 C24.2 C25.2 C26.2 C27.2 C28.2 C29.2 C30.2 C31.2 C32.2 C33.2 C34.2 CN1.12 CN1.14 CN2.3 CN2.5 D6.A IC1.12 IC1.18 IC1.31 IC1.47 IC1.63 J11.2 J11.3 P4.2 pad.6 POT1.2 POT1.7 POT1.8 POT1.11 POT1.12 POT1.13 POT2.2 POT2.7 POT2.8 POT2.11 POT2.12 POT3.2 POT3.7 POT3.8 POT3.11 POT3.13 POT4.2 POT4.7 POT4.8 POT4.11 Q1.2 Q2.2 R15.1 R16.1 R17.1 R26.1 R34.1 R35.1 SW1.1 SW1.2 SW2.1 SW2.2 U1.4 U2.4 U3.13 U3.21 U3.22 U4.2 U5.2 U5.4 | length 6886.2
  Top Layer w12: v1(2020,4504.45) 2020,4485 2035,4470 2160,4470 2172.05,4457.95 IC1.63 ; IC1.12 2181.1,4131.1 2240,4190 v1(2240,4255) ; v1(2160,4040) 2172.05,4027.95 IC1.18 2172.05,3910 2190,3892.05 R15.1 ; v1(2427.95,3842.05) IC1.31 ; C1.2 v1(2430,4895) ; IC1.47 2557.95,4327.95 2570,4340 v1(2570,4380) ; v1(2665,3730) POT3.7
  Top Layer w15: J11.2 J11.2@1315.91,4795.91 ; J11.3@1396.85,4553.15 J11.3 ; v1(1470,4370) 1470,4390 1510,4430 U5.4 ; R26.1@1760,3870 R26.1 ; v1(2295,3490) 2354.49,3490 2365,3500.51 v1(2365,3565) ; v1(2655,4775) 2665,4785 POT1.2 ; v1(2680,4630) 2680,4650 2690,4660 POT1.7 ; v1(2685,3905) 2723.23,3943.23 U2.4 2736.77,3943.23 2754,3926 2754,3867.93 2741.06,3855 POT3.2 ; U1.4 v1@2763.23,4513.23 ; POT3.11 2880,3805 2865,3820 2865,3840 v1(2880,3855) POT3.13 ; v1(2930,4640) POT1.8 2980,4660 3000,4680 3000,4765.55 C3.2@3019.45,4785 ; POT1.11 POT1.12 POT1.13 C3.2@3019.45,4785 ; CN1.12 CN1.14 ; C7.2@3020,3914.45 3020,3985.55 3029.45,3995 v1(3070,3995) ; v1(3070,4800) 3055.55,4785.55 C3.2 C3.2@3019.45,4785
  Top Layer w20: J11.2 1315.91,4634.09 J11.3@1396.85,4553.15 ; J11.2@1315.91,4795.91 1384.45,4864.45 C23.2 ; v1(1500,4110) 1500,4140.16 U5.2 ; SW1.1 SW1.2 SW2.1 2000.87,3469.13 2030,3440 v1(2050,3440) ; C33.2 v1(1710,4280) ; C14.1 C12.1 ; CN2.3 CN2.5 2090,4700 R17.1 ; v1@2763.23,4513.23 v1(2765,4515)
  Bottom Layer w12: C19.2 1950,4040 1991.1,3998.9 U3.13 ; v1(2150,3730) 2190,3770 C29.2 ; v1@2430,3844.09 C22.2 C25.2
  Bottom Layer w15: D6.A 1134.57,4649.57 1235,4750 J11.2 ; U4.2 v1(1470,4370) 1540,4370 1590,4320 R35.1 ; Q2.2 2257.4,3527.6 v1(2295,3490) ; v1(2365,3565) 2375,3565 Q1.2 2380,3604.8 C16.2 ; v1(2655,4775) 2670,4760 POT2.12 ; v1(2680,4630) 2690,4630 2710,4650 POT2.8 ; POT4.8 v1(2665,3730) 2635,3730 2630,3735 C10.2 2630.95,3765.55 2670.39,3805 POT4.11 ; POT2.11 POT2.12 ; v1(2880,3855) POT4.2 ; v1(2930,3715) POT4.7 ; v1(2930,4640) POT2.7 ; v1(3070,4800) 3054.45,4815.55 C5.2 2989.45,4785 POT2.2 2855,4785 2830,4760 POT2.12
  Bottom Layer w20: C19.2 C20.2 C21.2 2145.55,4040 v1(2160,4040) ; C18.2 v1(2020,4504.45) C17.2 C27.2 ; CN2.3 CN2.5 ; U3.22 2008.5,3440 v1(2050,3440) 2060,3450 U3.21 ; C26.2 C28.2 ; CN1.14 3110,3620 pad.6
  other v1: 1760,3890 1950,3900 1605,4075 2180,4130 1390,4135 1760,4145 1870,4235 1870,4305 1130,4440 2580,4505 3020,4530
GPIO: CN1.10 IC1.26 | length 1790.7
  Top Layer w12: IC1.26 2329.53,4039.53 v1(2350,4060)
  Medium Layer w12: v1(2160,3530) 2120,3530 2090,3500 2090,3460 2135,3415 2795,3415 2850,3470 2850,3560 CN1.10
  Bottom Layer w12: v1(2160,3530) 2149.79,3540.21 2149.79,3621.49 2168.3,3640 2170,3640 2350,3820 v1(2350,4060)
INT1_A/G: IC1.52 R10.1 | length 134.9
  Top Layer w12: IC1.52 2388.58,4538.23 R10.1
INT1_M: IC1.53 R8.1 | length 270.3
  Top Layer w12: IC1.53 2368.9,4361.1 v1(2390,4340)
  Bottom Layer w12: v1(2390,4340) 2400,4330 2460,4330 2470,4340 2470,4419.65 R8.1
INT2_A/G: IC1.51 R9.1 | length 170.1
  Top Layer w12: IC1.51 2408.27,4455.71 2442.55,4490 2460,4490 2480,4510 R9.1
JTDI: IC1.50 J7.1 | length 387.7
  Top Layer w12: v1@2427.95,4362.05 IC1.50
  Bottom Layer w12: J7.1 2340,4640 2350,4630 2350,4440 v1(2430,4360)
JTDO: IC1.55 J6.1 | length 249.9
  Top Layer w12: v1(2310,4490) 2329.53,4470.47 IC1.55
  Bottom Layer w12: J6.1 2290,4510 v1(2310,4490)
JTMS: IC1.46 J9.1 | length 602.9
  Top Layer w12: v1(2310,4320) 2321.73,4308.27 IC1.46
  Bottom Layer w12: J9.1 2190,4630 2220,4600 2220,4400 2300,4320 v1(2310,4320)
LED_3: IC1.24 R23.1 | length 992.4
  Top Layer w12: v1(1520,3850) R23.1 ; v1(2270,3920) 2280,3920 2290.16,3930.16 IC1.24
  Medium Layer w12: v1(1520,3850) 1520,3830 1565,3785 2225,3785 2270,3830 v1(2270,3920)
MOTOR1: IC1.28 R13.1 | length 196.9
  Top Layer w12: R13.1@2250.18,3860.18 R13.1@2270,3880 ; R13.1 2319.65,3920 2350,3920 2368.9,3938.9 IC1.28
MOTOR2: IC1.29 R14.1 | length 126.1
  Top Layer w12: R14.1 2350,3890 2388.58,3928.58 IC1.29
MTR1_A: CN1.7 R11.1 | length 347.5
  Bottom Layer w15: CN1.7 2850,3560 2850,3630 2875,3655 2990.35,3655 R11.1
MTR1_B: CN1.9 Q1.3 | length 619.2
  Bottom Layer w12: Q1.3 2360,3480 2380,3460 2880,3460 2900,3480 CN1.9
MTR2_A: CN1.11 R12.1 | length 225.7
  Top Layer w12: R12.1 3020,3675 v1(3050,3645)
  Bottom Layer w12: CN1.11 3005,3510 3050,3555 v1(3050,3645)
MTR2_B: CN1.13 Q2.3 | length 1019.2
  Bottom Layer w12: Q2.3 2220,3450 2240,3430 3080,3430 3100,3450 CN1.13
NetC12_2: C12.2 IC1.5 X1.2 | length 301.8
  Top Layer w12: X1.2@1960,4330 1960,4300 1991.1,4268.9 IC1.5
  Top Layer w15: C12.2 1915.55,4374.45 X1.2@1960,4330
NetC14_2: C14.2 IC1.6 X1.1 | length 286.1
  Top Layer w12: X1.1@1960,4201.26 1960,4220 1989.21,4249.21 IC1.6
  Top Layer w15: C14.2 1924.29,4165.55 X1.1@1960,4201.26
NetC15_1: C15.1 R29.1 R30.1 SW1.3 SW1.4 | length 642.1
  Top Layer w12: SW1.3@1520.51,3655 SW1.3 ; SW1.4 1879.13,3714.13 1954.65,3789.65 R29.1 R30.1
  Bottom Layer w12: v1(1520,3680) v1(1840,3680)
NetC16_1: C16.1 R31.2 SW2.3 SW2.4 | length 690.9
  Top Layer w12: v1(1870,3750) R31.2 ; SW2.3 SW2.4 2350,3663.78 v1(2350,3740)
  Bottom Layer w12: v1(1870,3750) 1870,3710 1890,3690 v1(2000,3690) ; v1(2350,3740) C16.1@2375.55,3740
NetC31_1: C31.1 S1.2 U5.1 | length 451.1
  Top Layer w20: S1.2 1410,4080 1440,4110 1440,4160 1390,4210 v1(1390,4250)
  Bottom Layer w20: v1(1390,4250) 1390,4234.45 C31.1
NetC34_1: C34.1 L2.1 U5.3 | length 204.3
  Top Layer w20: v1(1580,4170) 1580.16,4170.16 U5.3
  Bottom Layer w20: v1(1580,4170) 1580,4196.1 1598.35,4214.45 L2.1
NetCN2_1: CN2.1 J10.1 | length 307.8
  Bottom Layer w12: CN2.1 1890,4730 1930,4690 2137,4690 J10.1
NetCN2_2: CN2.2 J9.2 | length 424.4
  Bottom Layer w12: CN2.2 1940,4820 1940,4750 1970,4720 2170,4720 2190,4700 J9.2
NetCN2_4: CN2.4 J8.2 | length 670.3
  Bottom Layer w12: CN2.4 1990,4910 2020,4940 2330,4940 2390,4880 J8.2
NetCN2_6: CN2.6 J7.2 | length 520.3
  Bottom Layer w12: CN2.6 2090,4900 2110,4920 2310,4920 2360,4870 2360,4740 2340,4720 J7.2
NetCN2_8: CN2.8 J6.2 | length 342
  Top Layer w12: CN2.8 2180,4870 2140,4830 2140,4740 2170,4710 v1(2290,4710)
  Bottom Layer w12: J6.2 v1(2290,4710)
NetCN2_10: CN2.10 J5.2 | length 203.7
  Bottom Layer w12: J5.2 2240,4820 CN2.10
NetD1_1: D1.1 J1.2 | length 89.6
  Top Layer w12: D1.1 1360,3800 1377,3783 J1.2
NetD2_1: D2.1 J2.2 | length 89.6
  Top Layer w12: D2.1 1360,3700 1377,3683 J2.2
NetD3_1: D3.1 J3.2 | length 117.9
  Top Layer w12: D3.1@1367.4,3580 D3.1 1350,3600 1367,3617 J3.2
NetD4_1: D4.1 J4.2 | length 89.6
  Top Layer w12: D4.1 1360,3500 1377,3483 J4.2
NetD5_1: D5.1 R33.2 | length 255.5
  Top Layer w20: v1(1725,4605) D5.1
  Bottom Layer w15: R33.2 1725,4445.71 v1(1725,4605)
NetD7_K: D7.K J12.2 S1.1 | length 437.9
  Top Layer w20: v1(1310,4260) 1330,4260 1370,4300 J12.2
  Bottom Layer w20: S1.1 1120,4080 1190,4150 1244.49,4150 D7.K
NetIC1_40: IC1.40 R28.2 | length 120.2
  Top Layer w12: IC1.40 2639.49,4190.16 R28.2
NetIC1_41: IC1.41 R27.2 | length 145.1
  Top Layer w12: IC1.41 2570.16,4209.84 2630.32,4270 R27.2
NetIC1_60: IC1.60 R17.2 | length 176.8
  Top Layer w12: R17.2 2160,4520 2170,4510 2200,4510 2231.1,4478.9 IC1.60
NetJ1_1: J1.1 R23.2 | length 101.3
  Top Layer w12: J1.1 1492.65,3817 R23.2
NetJ2_1: J2.1 R24.2 | length 217.5
  Top Layer w12: J2.1 1453,3740 1580,3740 1600,3760 R24.2
NetJ3_1: J3.1 R25.2 | length 429.1
  Top Layer w12: J3.1 1633,3583 1680,3630 R25.2
NetJ4_1: J4.1 R26.2 | length 513
  Top Layer w12: J4.1 1448,3535 1625,3535 1750,3660 1750,3779.65 R26.2
NetP1_14: pad.7 R10.2 | length 1154.7
  Top Layer w15: R10.2@2400,4630 R10.2
  Medium Layer w15: v1(2425,4630) 2470,4585 2549.66,4585 3005,4129.66 3005,3880 3035,3850 pad.7
NetP1_15: pad.8 R9.2 | length 1039.2
  Top Layer w15: R9.2 v1(2480,4650)
  Medium Layer w15: v1(2480,4650) 2520,4610 2560,4610 3030,4140 3030,3970 3050,3950 pad.8
NetP1_17: pad.10 R8.2 | length 1156.6
  Medium Layer w15: v1(2425,4510) 2405,4510 2380,4535 2380,4640 2414.51,4674.51 2510.83,4674.51 2549.85,4635.49 2569.51,4635.49 3055,4150 pad.10
  Bottom Layer w15: v1@2425.35,4510.35 R8.2
NetP1_20: pad.13 R3.1 R7.1 | length 1409.5
  Top Layer w15: v1(2080,4600) R7.1
  Medium Layer w15: v1(2080,4600) 2080,4630 2130,4680 2340,4680 2360,4700 2780,4700 3030,4450 pad.13
  Bottom Layer w15: R3.1 2980,4450 pad.13
NetP1_21: pad.14 R2.1 R6.1 | length 1204.4
  Top Layer w15: R6.1 2240,4670 2250,4680 2405,4680 2430,4705 v1(2430,4730)
  Medium Layer w15: v1(2430,4730) 2430,4740 2490,4800 2720,4800 2955,4565 3085,4565 pad.14
  Bottom Layer w15: R2.1 3060,4490 3100,4530 pad.14
NetP1_23: pad.16 R1.2 | length 1186
  Bottom Layer w15: v1(2560,4660) 2530,4660 2470,4720 2470,4910 2495,4935 3105,4935 3160,4880 3160,4787.5 3122.5,4750 pad.16
NetQ1_1: Q1.1 R13.2 R15.2 | length 315.7
  Top Layer w12: R15.2 R13.2 2270,3750 2302.6,3717.4 v1(2322.6,3717.4)
  Bottom Layer w12: Q1.1 v1(2322.6,3717.4)
NetQ2_1: Q2.1 R14.2 R16.2 | length 476.7
  Top Layer w12: v1(2380,3820) 2370,3820 2350,3800 R14.2 R16.2
  Bottom Layer w12: Q2.1@2180,3590 2180,3620 2182.6,3622.6 ; Q2.1 2182.6,3622.6 ; v1(2380,3820) 2182.6,3622.6
NetR18_2: R18.2 U3.1 | length 2344.3
  Top Layer w15: R18.2@2720,4350 R18.2
  Medium Layer w15: v1(1280,3940) 1280,3740 1400,3620 2320,3620 2370,3670 2570,3670 2760,3860 2760,4290 v1(2700,4350)
NetR19_1: R19.1 U3.34 | length 1724.8
  Medium Layer w15: v1(1330,3550) 1370,3590 2340,3590 2390,3640 v1(2460,3640)
  Bottom Layer w15: U3.34 1282.44,3502.44 v1(1330,3550) ; v1(2460,3640) 2460,3770 2490,3800 2540,3800 2565,3825 2565,3865 2600,3900 2640,3900 2660,3920 R19.1
NetR20_2: R20.2 U3.2 | length 2708.4
  Top Layer w15: R20.2 2320,4605 2335,4590 v1(2420,4590)
  Medium Layer w15: v1(1340,3940) 1340,3730 1420,3650 2310,3650 2360,3700 2560,3700 2735,3875 2735,4275 v1(2420,4590)
NetR21_1: R21.1 U3.32 | length 1639.5
  Medium Layer w15: v1(1390,3550) 1394.51,3554.51 2190.49,3554.51 2204.51,3540.49 2425.49,3540.49 2440,3555 v1(2440,3600)
  Bottom Layer w15: v1(1390,3550) 1390,3467.95 U3.32 ; v1(2440,3600) 2430,3610 2430,3645.71 2430.06,3645.77 2430.06,3705.34 2430,3705.39 2430,3714.61 2430.06,3714.66 2430.06,3790.06 2460,3820 2460,3860.1 2492.4,3892.5 2522.85,3892.5 R21.1
NetR22_2: R22.2 U3.11 | length 1323.6
  Top Layer w20: v1(2700,4110) R22.2
  Medium Layer w12: v1(1960,3740) 1960,3743.01 1980,3763.01 2238.01,3763.01 2266,3791 2611,3791 2710,3890 2710,4100 v1(2700,4110)
  Bottom Layer w12: U3.11 1872.99,3827.01 v1(1960,3740)
NetR33_1: R33.1 U4.1 | length 226.6
  Bottom Layer w15: U4.1 1510,4300 1530,4280 1660,4280 1680,4300 R33.1
NetR35_2: R35.2 U4.5 | length 100.1
  Bottom Layer w15: U4.5 1575.71,4425 R35.2
NJTRST: IC1.56 J5.1 | length 387.4
  Top Layer w12: IC1.56 2309.84,4360.16 v1(2310,4360)
  Bottom Layer w12: J5.1 2240,4420 2300,4360 v1(2310,4360)
NRST: IC1.7 J10.2 R31.1 | length 1002.8
  Top Layer w12: R31.1 1870,3980 2020,4130 2020,4210 2039.53,4229.53 IC1.7 2129.53,4229.53 2150,4250 2150,4330 2180,4360 v1(2190,4360)
  Bottom Layer w12: J10.2 2140,4640 2200,4580 2200,4370 v1(2190,4360)
SCL_ACE: IC1.61 R7.2 | length 231.5
  Top Layer w12: R7.2 2080,4520 2110,4490 2190,4490 2211.42,4468.58 IC1.61
SCL_POT: POT1.10 POT2.10 POT3.10 POT4.10 R4.1 R27.1 | length 2265.6
  Top Layer w12: R27.1@2720,4270 R27.1 2940,4270 R4.1 v1(2950,4300) ; v1(2840,3780) POT3.10 ; v1(2920,4411.99) 2848.01,4411.99 2800,4460 2800,4665 2845,4710 POT1.10
  Medium Layer w12: v1(2920,4411.99) 2920,4330 v1(2950,4300)
  Bottom Layer w12: POT4.10 v1(2840,3780) 2800,3820 2800,3955 2920,4075 v1@2920,4408.98 ; POT2.10 2780,4710 2810,4680 2810,4490 2835,4465 2890,4465 2920,4435 v1(2920,4411.99)
SDA_ACE: IC1.59 R6.2 | length 134.6
  Top Layer w12: R6.2 2250.79,4538.86 IC1.59
SDA_POT: POT1.9 POT2.9 POT3.9 POT4.9 R5.1 R28.1 | length 2392.4
  Top Layer w12: R28.1 2760.35,4230 2840,4230 2850,4220 3010,4220 3020,4230 R5.1 v1(3020,4300) ; v1(2815,3755) POT3.9 ; v1(2880,4440) 2855,4440 2822,4473 2822,4657 2850,4685 POT1.9
  Medium Layer w12: v1(2760,3805) 2760,3775 2780,3755 v1(2815,3755) ; v1(2880,4440) 2950,4440 3020,4370 v1(3020,4300)
  Bottom Layer w12: POT4.9 v1(2815,3755) ; POT2.9 2755,4685 2790,4650 2790,4473.42 2823.42,4440 v1(2880,4440) 2893.01,4426.99 2893.01,4078.01 2780,3965 2780,3825 v1(2760,3805)
SYS_ON: IC1.23 R25.1 | length 800.5
  Top Layer w12: R25.1@1680,3870 R25.1 ; v1(2270,4070) 2270.47,4069.53 IC1.23
  Medium Layer w12: v1(1680,3850) 2100,3850 2270,4020 v1(2270,4070)
V_SENSOR1: C4.1 IC1.14 POT1.4 POT1.6 U1.1 | length 2840.4
  Top Layer w12: v1(2070,3970) 2040,3970 2010,4000 2010,4070 2031.73,4091.73 IC1.14 ; v1(2595,4905) 2640,4905 2665,4880 2665,4830 2620.55,4785.55 C4.1 2610,4750 2625,4735 POT1.4 2745,4735 2760,4720 2760,4700 2745,4685 POT1.6 2665,4685 2650,4670 2650,4610 2670,4590 U1.1
  Medium Layer w12: v1(2070,3970) 1980,3970 1790,4160 1790,4875 1855,4940 2570,4940 2595,4915 v1(2595,4905)
V_SENSOR2: C6.1 IC1.15 POT2.4 POT2.6 U1.7 | length 3067.8
  Top Layer w12: v1(2070,4010) 2040,4010 2030,4020 2030,4060 2042.05,4072.05 IC1.15 ; U1.7 2934.41,4564.41 2944.41,4574.41 2944.41,4604.41 2980,4640 v1(3020,4640)
  Medium Layer w12: v1(2070,4010) 1980,4010 1815,4175 1815,4865 1870,4920 2535,4920 2595,4860 2970,4860 3020,4810 v1(3020,4640)
  Bottom Layer w12: POT2.4 2875,4735 2860,4720 2860,4700 2875,4685 POT2.6 3010.55,4685 C6.1 v1(3020,4640)
V_SENSOR3: C9.1 IC1.11 POT3.4 POT3.6 U2.1 | length 1882.9
  Top Layer w12: IC1.11 2160.79,4150.79 2200,4190 v1(2200,4220) ; v1(2580,3765) 2620,3805 POT3.4 ; POT3.6 2750,3755 ; U2.1 2780,4020 ; v1(2765,3710) 2765,3740 2750,3755 ; v1(2790,4200) 2790,4030 2780,4020 ; 2750,3755 2770,3755 2820,3805 2820,3980 2780,4020
  Top Layer w15: C9.1 2655.55,4020 U2.1
  Bottom Layer w12: v1(2200,4220) 2770,4220 v1(2790,4200) ; v1(2580,3765) 2580,3720 2600,3700 2705,3700 2715,3710 v1(2765,3710)
V_SENSOR4: C11.1 IC1.10 POT4.4 POT4.6 U2.7 | length 1663
  Top Layer w12: IC1.10 2140.47,4170.47 v1(2160,4190)
  Top Layer w15: v1(2820,4160) 2820,4040 2865.59,3994.41 U2.7 2945.59,3994.41 v1(2950,3990)
  Bottom Layer w12: v1(2160,4190) 2760,4190 2790,4160 v1(2820,4160) ; POT4.6 2885,3755 2870,3770 2870,3790 2885,3805 ; POT4.4 2885,3805 ; v1(2950,3990) 2865,3990 2820,3945 2820,3830 2845,3805 2885,3805
  Bottom Layer w15: v1(2950,3990) 2995,3990 3020,3965 3020,3914.45 C11.1
VBAT: C30.1 D7.A P4.1 R32.2 U4.3 | length 698.1
  Bottom Layer w20: D7.A 1115.51,4275.51 1210,4370 R32.2 1289.29,4419.29 P4.1 1320,4430 1360,4390 1360,4350 1390,4320 U4.3 1430,4290 1450,4270 1470,4270 1500,4240 C30.1
WAKEUP: IC1.17 R30.2 | length 127.7
  Top Layer w12: R30.2 2110,3900.35 2152.36,3942.72 IC1.17
pads on no net: D6.0 D7.0 IC1.2 IC1.3 IC1.4 IC1.8 IC1.9 IC1.25 IC1.27 IC1.33 IC1.37 IC1.38 IC1.39 IC1.42 IC1.44 IC1.45 IC1.54 IC1.57 IC1.62 U3.3 U3.4 U3.5 U3.6 U3.7 U3.8 U3.9 U3.10 U3.14 U3.15 U3.16 U3.17 U3.18 U3.19 U3.20 U3.23 U3.24 U3.25 U3.26 U3.27 U3.28 U3.29 U3.30 U3.33
copper on no net: | length 3292.3
  Top Layer w10: 890,3420 910,3360 ; 890,4910 910,4970 ; 900,3360 920,3360 ; 900,4970 920,4970 ; 910,3894.08 910,3360 ; 910,4435.92 910,4970 ; 930,3420 910,3360 ; 930,4910 910,4970 ; 1000,3310 1000,3330 ; 1060,3300 1000,3320 ; 1060,3340 1000,3320 ; 1819.09,3320 1000,3320 ; 2380.91,3320 3200,3320 ; 3140,3300 3200,3320 ; 3140,3340 3200,3320 ; 3200,3310 3200,3330

## Polygon pours and split planes (outlines as drawn)
GND on GND (split plane): 3179.9,4949.9 3179.9,3400.1 1250.1,3400.1 1250.1,3975 1249.71,3976.95 1248.6,3978.6 1246.95,3979.71 1245,3980.1 1030.1,3980.1 1030.1,4949.9

## Other copper
Top Layer:
  text "1610 (mil)" at 945.99,3904.08 h60 r90
  text "2200 (mil)" at 1829.09,3284.01 h60
GND (plane layer: these items are gaps in the copper):
  region: 1000,3975 1245,3975 1245,3370 1000,3370
  lines w10: 1000,3975 1245,3975 1245,3370

## Silkscreen, mask and mechanical layers (free items; w line width, h text height)
Top Overlay:
  lines w10: 2450,3460 3145,3460 3145,3660 2450,3660 2450,3460
  text "TIAGO COELHO MAGALHAES" at 1480,4925 h5
  text "P1" at 2510,4895 h20
  text "STEVAL" at 2775,4895 h20
  text "CHARGING" at 1785,4595 h20 r90
  text "+" at 1285,4465 h60
  text "FUNCTION" at 1070,3790 h20
  text "LOW BAT" at 1090,3690 h20
  text "SYSTEM ON" at 1050,3590 h20
  text "BLUETOOTH" at 1050,3480 h20
  text "WAKE UP" at 1640,3415 h20
  text "RESET" at 2140,3415 h20
Mechanical 1:
  the board outline again, w10

## Text inside footprints (layer, text, board x,y; h text height)
CN1: Top Overlay "1" at 2430,3490 h20; Top Overlay "2" at 2425,3630 h20